# Altium PCB VOLT_REG_PCB.PcbDoc
Units mil, origin at the board's own origin, x right, y up, seen from the top; angles counter-clockwise.
Board outline 2559.06 x 1181.1 mil, 2 copper layers (Top Layer, Bottom Layer); 22 components, 7 nets, 47 pads, 450 vias.
Unrouted connection lines stored in the file: 6.
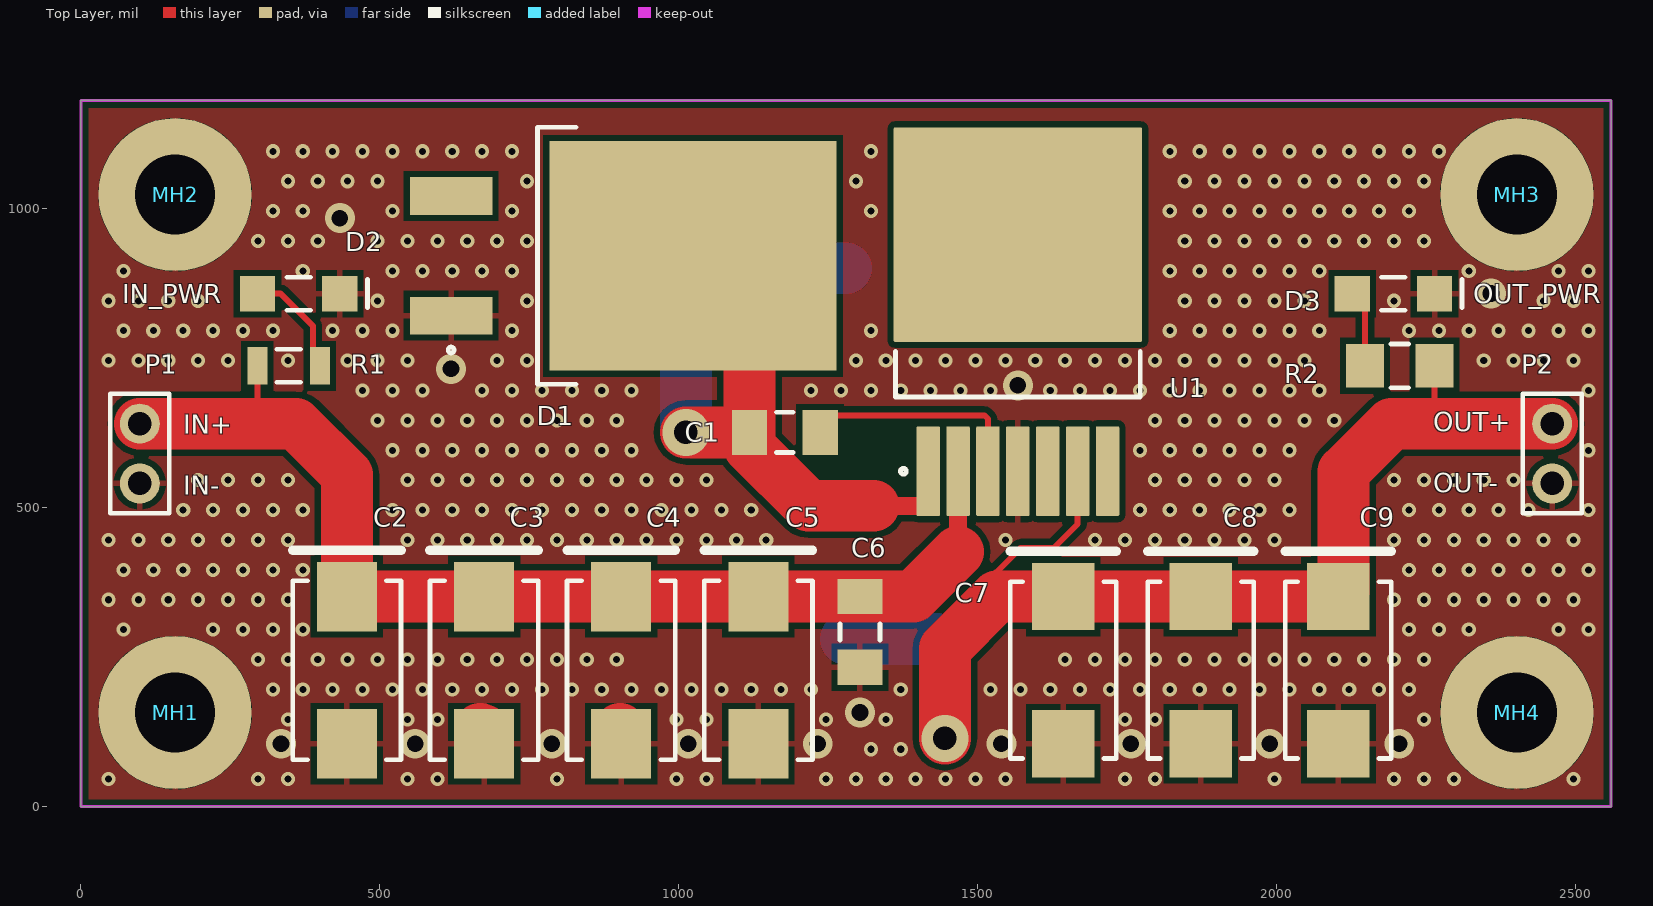
[diagram p0: Top Layer view]
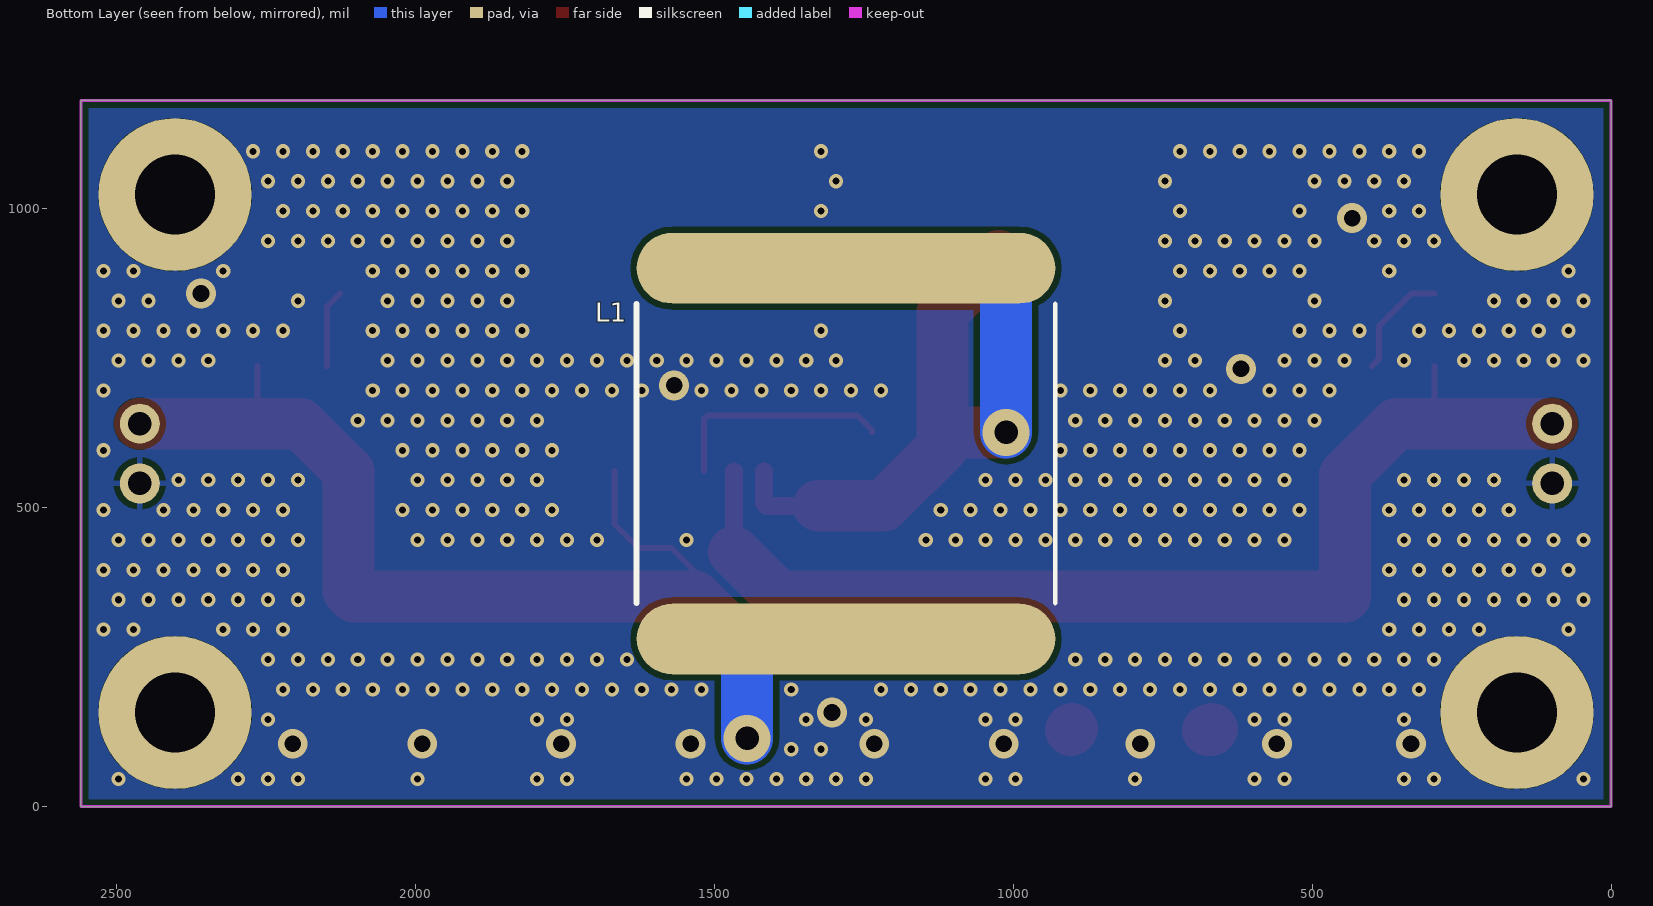
[diagram p1: Bottom Layer view, seen from below]
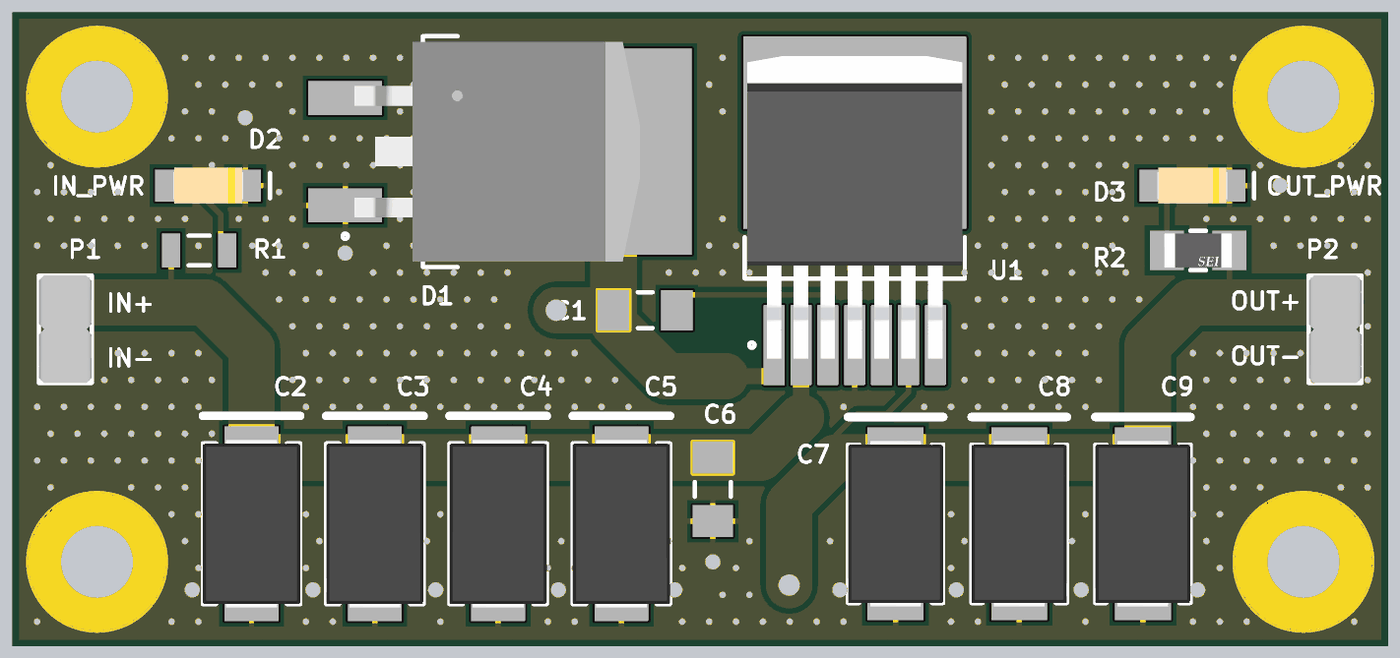
[diagram p2: 3D render of the assembled board from above, using the file's embedded part models]

## Layer stack, top to bottom
Top Solder: solder mask 0.4, Solder Resist, Dk 3.5
Top Layer: signal copper 1.4
Dielectric 1: dielectric 12.6, FR-4, Dk 4.8
Bottom Layer: signal copper 1.4
Bottom Solder: solder mask 0.4, Solder Resist, Dk 3.5

## Board outline
0,0 0,1181.1 2559.06,1181.1 2559.06,0

## Design rules (kind name [scope] priority, off if disabled: settings)
BoardOutlineClearance [All] p1: gap=7.87 ignorepadtopadclearanceinfootprint=FALSE
Clearance [All] p1: gap=10 ignorepadtopadclearanceinfootprint=TRUE except(0: Arc-Hole Track-Hole SMDPad-Hole THPad-Hole Via-Hole Fill-Hole Poly-Hole Region-Hole Text-Hole; 5: Arc-Arc Arc-Track Track-Track SMDPad-SMDPad; 7.87: Arc-SMDPad Track-SMDPad; 12.99: Arc-THPad Track-THPad; 19.68: THPad-THPad)
HoleSize [All] p1: absolutevalues=TRUE maxlimit=248.03 minlimit=11.81 maxpercent=80.000 minpercent=20.000
MinimumAnnularRing [All] p1: minimumring=5.12
MinimumSolderMaskSliver [All] p1: minsoldermaskwidth=7.87
PlaneConnect [All] p1: planeconnectstyle=Direct reliefexpansion=20 reliefentries=4 reliefconductorwidth=10 reliefairgap=10
PolygonConnect PolygonConnect_GNDVia [IsVia AND InNet('GND')] p1: connectstyle=Direct reliefconductorwidth=10 reliefentries=4 polygonreliefangle="90 Angle" airgapwidth=10
PolygonConnect PolygonConnect_1 [All] p2 off: connectstyle=Relief reliefconductorwidth=10 reliefentries=4 polygonreliefangle="90 Angle" airgapwidth=10
RoutingVias [All] p1: holewidth=28 width=50 viastyle="Through Hole" minholewidth=11.81 minwidth=23.62 maxholewidth=248.03 maxwidth=50
SilkToSolderMaskClearance [IsPad] p1: minsilkscreentomaskgap=5.91 clearancetoexposedcopper=TRUE
SolderMaskExpansion [All] p1: expansion=4 istentingtop=FALSE
Width [All] p1: maxlimit=787.4 minlimit=5 preferedwidth=10 minimp=50.000000 maximp=50.000000 favimp=50.000000
26 further rules are at their usual default settings.

## Components (designator, comment, footprint, x,y, rotation, side; value= is the part's Value field where it differs from the comment)
C1 "0.01uF" CAP_1206_AVX_1206 1177.17,625.98 r180 top
C2 "10uF" CAP_2917_KEMT_T495_D 444.88,228.35 r270 top
C3 "10uF" CAP_2917_KEMT_T495_D 674.23,228.35 r270 top
C4 "10uF" CAP_2917_KEMT_T495_D 903.57,228.35 r270 top
C5 "10uF" CAP_2917_KEMT_T495_D 1132.91,228.35 r270 top
C6 "0.1uF" CAP_1206_AVX_1206 1302.91,292.32 r90 top
C7 "220uF" CAP_2917_AVX_7343_31 1642.91,228.35 r270 top
C8 "220uF" CAP_2917_AVX_7343_31 1872.91,228.35 r270 top
C9 "220uF" CAP_2917_AVX_7343_31 2102.91,228.35 r270 top
D1 "45V, 7.5A" DIO_SCHOTTKY_TO_263_3_ST_D2PAK 821.36,921.26 r0 top
D2 "GREEN" "DIO_1206_ LTST_C150" 364.17,857.95 r0 top
D3 "GREEN" "DIO_1206_ LTST_C150" 2194.88,857.95 r0 top
L1 "14.8uH" IND_NON_STD_LCI50 1279.53,590.55 r270 bottom
MH1 "M3" MH_M3 157.48,157.48 r0 top
MH2 "M3" MH_M3 157.48,1023.62 r0 top
MH3 "M3" MH_M3 2401.57,1023.62 r0 top
MH4 "M3" MH_M3 2401.57,157.48 r0 top
P1 "826629-2" CONN_HEADER_MALE_0.1_2x1 98.43,590.55 r270 top
P2 "826629-2" CONN_HEADER_MALE_0.1_2x1 2460.63,590.55 r270 top
R1 "1kR" RES_1206_YAGEO_RC_1206 347.44,737.32 r180 top
R2 "330R" RES_1206_SE_RMCF1206 2205.68,737.32 r0 top
U1 "LM2677" IC_TO_263_7_KTW0007B 1566.93,811.02 r90 top

## Footprints (in the part's own frame and the unit in brackets; to place one, negate y for a bottom-side part, rotate by r counter-clockwise, add the part's x,y. Pads: shape width x height; smd on the part's side, far side on the other; paste and mask are expansions set on the pad)
CAP_1206_AVX_1206 [mm] "SMD, 2-Leads, Body 3.4x1.8mm, IPC Low Density"
  rect 1.5x1.9 smd: 1(-1.5,0) 2(1.5,0)
  silkscreen extent -0.35,-0.85 0.35,0.85, body extent -1.7,-0.9 1.7,0.9, height 1.52
CAP_2917_AVX_7343_31 [mm] "Molded Capacitor, 2-Leads, Body 7.5x4.5mm, IPC Low Density"
  rect 2.85x2.65 smd: 1(-3.125,0) 2(3.125,0)
  silkscreen extent -5.05,-2.25 3.75,2.25, body extent -3.97,-2.25 3.97,2.25, height 3.1
CAP_2917_KEMT_T495_D [mm] "Molded Capacitor, 2-Leads, Body 7.6x4.6mm, IPC Low Density"
  rect 2.95x2.55 smd: 1(-3.125,0) 2(3.125,0)
  silkscreen extent -5.1,-2.3 3.8,2.3, body extent -4.02,-2.3 4.02,2.3, height 3.1
CONN_HEADER_MALE_0.1_2x1 [mm] "Connector"
  round 1.7 hole 1: 1(-1.27,0) 2(1.27,0)
  silkscreen extent -2.54,-1.25 2.54,1.25, body extent -2.54,-1.25 2.54,1.25, height 9.51
"DIO_1206_ LTST_C150" [mm] "Diode"
  rect 1.5x1.5 smd: 1(-1.75,0) 2(1.75,0)
  silkscreen extent -0.5,-0.7 2.92,0.7, body extent -1.65,-0.85 1.65,0.85, height 1.2
DIO_SCHOTTKY_TO_263_3_ST_D2PAK [mm] "Diode Schottky"
  rect 3.5x1.6 smd: A(-5.138,-2.54) NC(-5.138,2.54)
  rect 12.2x9.75 smd: K(5.138,0)
  silkscreen extent -5.26,-5.46 0.17,5.46, body extent -4.7,-5.19 8.78,5.19, height 4.6
IC_TO_263_7_KTW0007B [mm] "DPAK, 7-Leads, Body 9.4x10.4mm, Pitch 1.27mm, IPC Low Density"
  rrect10% 3.8x1 smd: 1(-6.35,3.81) 2(-6.35,2.54) 3(-6.35,1.27) 4(-6.35,0) 5(-6.35,-1.27) 6(-6.35,-2.54) 7(-6.35,-3.81)
  rrect1% 9.1x10.55 smd: 8(3.7,0)
  silkscreen extent -6.47,-5.2 -1.25,5.2, body extent -6.98,-5.08 7.32,5.08, height 4.58
IND_NON_STD_LCI50 [mm] "Inductor"
  rrect100% 3x17.78 smd: 1(-7.875,0) 2(7.875,0)
  silkscreen extent -6.35,-8.89 6.35,8.89, body extent -8.41,-8.79 8.41,8.79, height 9.91
MH_M3 [mm] "Mounting Holes, M3"
  round 6.5 hole 3.4: 1(0,0)
RES_1206_SE_RMCF1206 [mil] "Resistor"
  rect 63.14x73.16 smd paste+0 mask+0: 1(-58.09,0) 2(58.09,0)
  silkscreen extent -15,-37 15,37, body extent -109,-56 109,56, height 10
RES_1206_YAGEO_RC_1206 [mm] "Chip Resistor, 2-Leads, Body 3.10x1.60mm, IPC High Density"
  rect 0.85x1.6 smd: 1(-1.325,0) 2(1.325,0)
  silkscreen extent -0.5,-0.7 0.5,0.7, body extent -1.6,-0.85 1.6,0.85, height 0.65

## Part data
C1: library part CAP_0.01uF_10%_50V, "±10% 50V Ceramic Capacitor X7R 1206 (3216 Metric)", Case/Package="1206 (3216 Metric)", Manufacturer="AVX Corporation", Manufacturer Part Number=12065C103KAT2A, Supplier Part Number 1=478-1542-1-ND, Supplier 1=Digi-Key
C2 C3 C4 C5: library part PCAP_10uF_10%_35V, "Molded Tantalum Capacitors 2917 (7343 Metric) 260mOhm", Case/Package="2917 (7343 Metric)", Manufacturer=KEMET, Manufacturer Part Number=T495D106K035ATE260, Supplier Part Number 1=399-11082-1-ND, Supplier 1=Digi-Key
C6: library part CAP_0.1uF_10%_50V, "±10% 50V Ceramic Capacitor X8R 1206 (3216 Metric)", Case/Package="1206 (3216 Metric)", Manufacturer="AVX Corporation", Manufacturer Part Number=12065F104K4T2A, Supplier Part Number 1=478-3618-1-ND, Supplier 1=Digi-Key
C7 C8 C9: library part PCAP_220uF_20%_10V, "Molded Tantalum Capacitors 2917 (7343 Metric) 100mOhm", Case/Package="2917 (7343 Metric)", Manufacturer="AVX Corporation", Manufacturer Part Number=TPSD227M010R0100, Supplier Part Number 1=478-4110-1-ND, Supplier 1=Digi-Key
D1: library part DIO_SCHOTTKY_45V_7.5A, "Diode Schottky 7.5A Surface Mount D²PAK", Case/Package="TO-263-3, D²Pak (2 Leads + Tab), TO-263AB", Manufacturer=STMicroelectronics, Manufacturer Part Number=STPS745G-TR, Supplier Part Number 1=497-12675-1-ND, Supplier 1=Digi-Key
D2 D3: library part DIO_LED_GREEN, "LED GREEN CLEAR CHIP SMD", Case/Package="1206 (3216 Metric)", Manufacturer="Lite-On Inc.", Manufacturer Part Number=LTST-C150GKT, Supplier Part Number 1=160-1169-1-ND, Supplier 1=Digi-Key
L1: library part IND_14.8uH_20%_5A, "Shielded Toroidal Inductor 27mOhm Nonstandard", Case/Package=Nonstandard, Manufacturer="Pulse Electronics Power", Manufacturer Part Number=P0846SNL, Supplier Part Number 1=553-1126-5-ND, Supplier 1=Digi-Key
MH1 MH2 MH3 MH4: library part MH_M3, "M3 Mounting Hole"
P1 P2: library part CONN_VERT_HEADER_MALE_0.1_2x1, "CONN HEADER VERT 2POS 2.54MM", Case/Package="Header, Breakaway", Manufacturer="TE Connectivity AMP Connectors", Supplier Part Number 1=A105107-ND, Manufacturer Part Number=826629-2, Supplier 1=Digi-Key
R1: library part RES_1kR_1%_0.25W, "±1% 0.25W, 1/4W Chip Resistor 1206 (3216 Metric) Moisture Resistant Thick Film", Case/Package="1206 (3216 Metric)", Manufacturer=Yageo, Manufacturer Part Number=RC1206FR-071KL, Supplier Part Number 1=311-1.00KFRCT-ND, Supplier 1=Digi-Key
R2: library part RES_330R_5%_0.25W, "±5% 0.25W, 1/4W Chip Resistor 1206 (3216 Metric) Automotive AEC-Q200 Thick Film", Case/Package="1206 (3216 Metric)", Manufacturer="Stackpole Electronics Inc", Manufacturer Part Number=RMCF1206JT330R, Supplier Part Number 1=RMCF1206JT330RCT-ND, Supplier 1=Digi-Key
U1: library part IC_LM2677, "Buck Switching Regulator IC Positive Fixed 5V 1 Output 5A TO-220-7 (Formed Leads)", Case/Package="TO-263-8, D²Pak (7 Leads + Tab), TO-263CA", Manufacturer="Texas Instruments", Manufacturer Part Number=LM2677S-5.0/NOPB, Supplier Part Number 1=LM2677S-5.0/NOPB-ND, Supplier 1=Digi-Key

## Via types
v1: diameter 23.62, hole 11.81, Top Layer to Bottom Layer, tented both sides, 434 vias
v2: diameter 50, hole 28, Top Layer to Bottom Layer, tented both sides, 14 vias
v3: diameter 78.74, hole 39.37, Top Layer to Bottom Layer, tented both sides, 2 vias

## Nets (pads, with @x,y where several pads share a name; then routed paths per layer and width w, separated by ;. In a path a pad name is that pad's centre, name@x,y a point inside that pad or via, vN(x,y) a via of type N, cw(c..) or ccw(c..) an arc to the next point about the centre after c; other vN are vias at no path point)
GND: C2.2 C3.2 C4.2 C5.2 C6.1 C7.2 C8.2 C9.2 D1.A D2.2 D3.2 MH1.1 MH2.1 MH3.1 MH4.1 P1.2 P2.2 U1.4 | length 10.5
  Top Layer w86.61: C3.2@667.34,129.92 669.3,127.95 C3.2@674.23,127.95 ; C4.2@901.6,129.92 C4.2@903.57,127.95
  other v1: 46.06,46.06 296.06,46.06 346.06,46.06 546.06,46.06 596.06,46.06 796.06,46.06 996.06,46.06 1046.06,46.06 1246.06,46.06 1296.06,46.06 1346.06,46.06 1396.06,46.06 1446.06,46.06 1496.06,46.06 1546.06,46.06 1746.06,46.06 1796.06,46.06 1996.06,46.06 2196.06,46.06 2246.06,46.06 2296.06,46.06 2496.06,46.06 1321.06,96.06 1371.06,96.06 346.06,146.06 546.06,146.06 596.06,146.06 996.06,146.06 1046.06,146.06 1246.06,146.06 1346.06,146.06 1746.06,146.06 1796.06,146.06 2246.06,146.06 321.06,196.06 371.06,196.06 421.06,196.06 471.06,196.06 521.06,196.06 571.06,196.06 621.06,196.06 671.06,196.06 721.06,196.06 771.06,196.06 821.06,196.06 871.06,196.06 921.06,196.06 971.06,196.06 1021.06,196.06 1071.06,196.06 1121.06,196.06 1171.06,196.06 1221.06,196.06 1371.06,196.06 1521.06,196.06 1571.06,196.06 1621.06,196.06 1671.06,196.06 1721.06,196.06 1771.06,196.06 1821.06,196.06 1871.06,196.06 1921.06,196.06 1971.06,196.06 2021.06,196.06 2071.06,196.06 2121.06,196.06 2171.06,196.06 2221.06,196.06 296.06,246.06 346.06,246.06 396.06,246.06 446.06,246.06 496.06,246.06 546.06,246.06 596.06,246.06 646.06,246.06 696.06,246.06 746.06,246.06 796.06,246.06 846.06,246.06 896.06,246.06 1646.06,246.06 1696.06,246.06 1746.06,246.06 1796.06,246.06 1846.06,246.06 1896.06,246.06 1946.06,246.06 1996.06,246.06 2046.06,246.06 2096.06,246.06 2146.06,246.06 2196.06,246.06 2246.06,246.06 71.06,296.06 221.06,296.06 271.06,296.06 321.06,296.06 371.06,296.06 2221.06,296.06 2271.06,296.06 2321.06,296.06 2471.06,296.06 2521.06,296.06 46.06,346.06 96.06,346.06 146.06,346.06 196.06,346.06 246.06,346.06 296.06,346.06 346.06,346.06 2196.06,346.06 2246.06,346.06 2296.06,346.06 2346.06,346.06 2396.06,346.06 2446.06,346.06 2496.06,346.06 71.06,396.06 121.06,396.06 171.06,396.06 221.06,396.06 271.06,396.06 321.06,396.06 371.06,396.06 2221.06,396.06 2271.06,396.06 2321.06,396.06 2371.06,396.06 2421.06,396.06 2471.06,396.06 2521.06,396.06 46.06,446.06 96.06,446.06 146.06,446.06 196.06,446.06 246.06,446.06 296.06,446.06 346.06,446.06 546.06,446.06 596.06,446.06 646.06,446.06 696.06,446.06 746.06,446.06 796.06,446.06 846.06,446.06 896.06,446.06 946.06,446.06 996.06,446.06 1046.06,446.06 1096.06,446.06 1146.06,446.06 1546.06,446.06 1696.06,446.06 1746.06,446.06 1796.06,446.06 1846.06,446.06 1896.06,446.06 1946.06,446.06 1996.06,446.06 2196.06,446.06 2246.06,446.06 2296.06,446.06 2346.06,446.06 2396.06,446.06 2446.06,446.06 2496.06,446.06 171.06,496.06 221.06,496.06 271.06,496.06 321.06,496.06 371.06,496.06 521.06,496.06 571.06,496.06 621.06,496.06 671.06,496.06 721.06,496.06 771.06,496.06 821.06,496.06 871.06,496.06 921.06,496.06 971.06,496.06 1021.06,496.06 1071.06,496.06 1121.06,496.06 1771.06,496.06 1821.06,496.06 1871.06,496.06 1921.06,496.06 1971.06,496.06 2021.06,496.06 2221.06,496.06 2271.06,496.06 2321.06,496.06 2371.06,496.06 2421.06,496.06 2521.06,496.06 196.06,546.06 246.06,546.06 296.06,546.06 346.06,546.06 546.06,546.06 596.06,546.06 646.06,546.06 696.06,546.06 746.06,546.06 796.06,546.06 846.06,546.06 896.06,546.06 946.06,546.06 996.06,546.06 1046.06,546.06 1796.06,546.06 1846.06,546.06 1896.06,546.06 1946.06,546.06 1996.06,546.06 2196.06,546.06 2246.06,546.06 2296.06,546.06 2346.06,546.06 2396.06,546.06 521.06,596.06 571.06,596.06 621.06,596.06 671.06,596.06 721.06,596.06 771.06,596.06 821.06,596.06 871.06,596.06 921.06,596.06 1771.06,596.06 1821.06,596.06 1871.06,596.06 1921.06,596.06 1971.06,596.06 2021.06,596.06 2521.06,596.06 496.06,646.06 546.06,646.06 596.06,646.06 646.06,646.06 696.06,646.06 746.06,646.06 796.06,646.06 846.06,646.06 896.06,646.06 1796.06,646.06 1846.06,646.06 1896.06,646.06 1946.06,646.06 1996.06,646.06 2046.06,646.06 2096.06,646.06 471.06,696.06 521.06,696.06 571.06,696.06 671.06,696.06 721.06,696.06 771.06,696.06 821.06,696.06 871.06,696.06 921.06,696.06 1221.06,696.06 1271.06,696.06 1321.06,696.06 1371.06,696.06 1421.06,696.06 1471.06,696.06 1521.06,696.06 1621.06,696.06 1671.06,696.06 1721.06,696.06 1771.06,696.06 1821.06,696.06 1871.06,696.06 1921.06,696.06 1971.06,696.06 2021.06,696.06 2071.06,696.06 2521.06,696.06 46.06,746.06 96.06,746.06 146.06,746.06 196.06,746.06 246.06,746.06 346.06,746.06 446.06,746.06 496.06,746.06 546.06,746.06 696.06,746.06 746.06,746.06 1296.06,746.06 1346.06,746.06 1396.06,746.06 1446.06,746.06 1496.06,746.06 1546.06,746.06 1596.06,746.06 1646.06,746.06 1696.06,746.06 1746.06,746.06 1796.06,746.06 1846.06,746.06 1896.06,746.06 1946.06,746.06 1996.06,746.06 2046.06,746.06 2346.06,746.06 2396.06,746.06 2446.06,746.06 2496.06,746.06 71.06,796.06 121.06,796.06 171.06,796.06 221.06,796.06 271.06,796.06 321.06,796.06 421.06,796.06 471.06,796.06 521.06,796.06 721.06,796.06 1321.06,796.06 1821.06,796.06 1871.06,796.06 1921.06,796.06 1971.06,796.06 2021.06,796.06 2071.06,796.06 2221.06,796.06 2271.06,796.06 2321.06,796.06 2371.06,796.06 2421.06,796.06 2471.06,796.06 2521.06,796.06 46.06,846.06 96.06,846.06 146.06,846.06 196.06,846.06 496.06,846.06 746.06,846.06 1846.06,846.06 1896.06,846.06 1946.06,846.06 1996.06,846.06 2046.06,846.06 2196.06,846.06 2446.06,846.06 2496.06,846.06 71.06,896.06 371.06,896.06 521.06,896.06 571.06,896.06 621.06,896.06 671.06,896.06 721.06,896.06 1821.06,896.06 1871.06,896.06 1921.06,896.06 1971.06,896.06 2021.06,896.06 2071.06,896.06 2321.06,896.06 2471.06,896.06 2521.06,896.06 296.06,946.06 346.06,946.06 396.06,946.06 496.06,946.06 546.06,946.06 596.06,946.06 646.06,946.06 696.06,946.06 746.06,946.06 1846.06,946.06 1896.06,946.06 1946.06,946.06 1996.06,946.06 2046.06,946.06 2096.06,946.06 2146.06,946.06 2196.06,946.06 2246.06,946.06 321.06,996.06 371.06,996.06 521.06,996.06 721.06,996.06 1321.06,996.06 1821.06,996.06 1871.06,996.06 1921.06,996.06 1971.06,996.06 2021.06,996.06 2071.06,996.06 2121.06,996.06 2171.06,996.06 2221.06,996.06 346.06,1046.06 396.06,1046.06 446.06,1046.06 496.06,1046.06 746.06,1046.06 1296.06,1046.06 1846.06,1046.06 1896.06,1046.06 1946.06,1046.06 1996.06,1046.06 2046.06,1046.06 2096.06,1046.06 2146.06,1046.06 2196.06,1046.06 2246.06,1046.06 321.06,1096.06 371.06,1096.06 421.06,1096.06 471.06,1096.06 521.06,1096.06 571.06,1096.06 621.06,1096.06 671.06,1096.06 721.06,1096.06 1321.06,1096.06 1821.06,1096.06 1871.06,1096.06 1921.06,1096.06 1971.06,1096.06 2021.06,1096.06 2071.06,1096.06 2121.06,1096.06 2171.06,1096.06 2221.06,1096.06 2271.06,1096.06
  other v2: 334.65,105.31 559.06,105.31 787.4,105.31 1015.75,105.31 1232.28,105.31 1539.37,105.31 1755.91,105.31 1988.19,105.31 2204.72,105.31 1302.91,157.48 1566.93,704.72 619.09,732.28 2358.27,858.27 433.07,984.25
NetC1_1: C1.1 U1.3 | length 385.1
  Top Layer w10: C1.1 1236.22,630.1 1260.75,654.62 1511.07,654.62 1516.93,648.77 U1.3
NetC1_2: C1.2 D1.K L1.1 U1.1 | length 1401.3
  Top Layer w30: 1325.71,484.25 1344.65,503.19 1412.24,503.19 1416.93,507.87 U1.1
  Top Layer w86.61: v3(1011.81,625.98) C1.2 ; D1.K 1118.11,826.77 C1.2 ; 1325.71,503.19 1216.7,503.19 1118.11,601.78 C1.2
  Bottom Layer w86.61: v3(1011.81,625.98) 1011.81,886.04 1026.36,900.59 L1.1
NetC2_1: C2.1 C3.1 C4.1 C5.1 C6.2 P1.1 R1.2 U1.2 | length 1870.1
  Top Layer w10: 295.28,640.55 R1.2
  Top Layer w30: 1466.93,426.4 U1.2
  Top Layer w86.61: P1.1 295.28,640.55 359.45,640.55 444.88,555.12 C2.1 C3.1 C4.1 C5.1 C6.2 1391.91,351.38 1466.93,426.4
NetC7_1: C7.1 C8.1 C9.1 L1.2 P2.1 R2.2 U1.6 | length 2157.4
  Top Layer w10: 1531.5,351.38 1531.5,392.61 1571.59,432.7 1626.84,432.7 1666.93,472.8 U1.6 ; 2263.78,640.55 R2.2
  Top Layer w86.61: v3(1444.88,114.17) 1444.88,264.76 1531.5,351.38 C7.1 C8.1 C9.1 2111.77,360.24 2111.77,560.59 2191.73,640.55 2263.78,640.55 P2.1
  Bottom Layer w86.61: L1.2 1430.33,280.51 1444.88,265.96 v3(1444.88,114.17)
NetD2_1: D2.1 R1.1 | length 186.6
  Top Layer w10: D2.1 334.17,857.95 387.87,804.25 387.87,749.06 R1.1
NetD3_1: D3.1 R2.1 | length 129.6
  Top Layer w10: D3.1 2147.59,836.35 R2.1
pads on no net: D1.NC U1.5 U1.7 U1.8

## Polygon pours and split planes (outlines as drawn)
GND on Top Layer "GND" (solid, remove dead copper, pour order 1): 0,0 0,1181.1 2559.06,1181.1 2559.06,0
GND on Bottom Layer "GND" (solid, remove dead copper, pour order 0): 0,0 0,1181.1 2559.06,1181.1 2559.06,0

## Keep-outs
Keep-Out Layer:
  lines w5: 0,0 2559.06,0 ; 0,0 0,1181.1 ; 0,0 2559.06,0 ; 0,0 0,1181.1 ; 0,1181.1 2559.06,1181.1 ; 0,1181.1 2559.06,1181.1 ; 2559.06,0 2559.06,1181.1 ; 2559.06,0 2559.06,1181.1

## Silkscreen, mask and mechanical layers (free items; w line width, h text height)
Top Overlay:
  text "IN_PWR" at 68.99,842.04 h32
  text "OUT_PWR" at 2328.83,842.04 h32
  text "OUT+" at 2261.91,628.05 h32
  text "IN+" at 171.35,624.11 h32
  text "OUT-" at 2261.91,525.69 h32
  text "IN-" at 171.35,521.75 h32